# EAGLE board TD_DAC_aux (EAGLE 6.4)
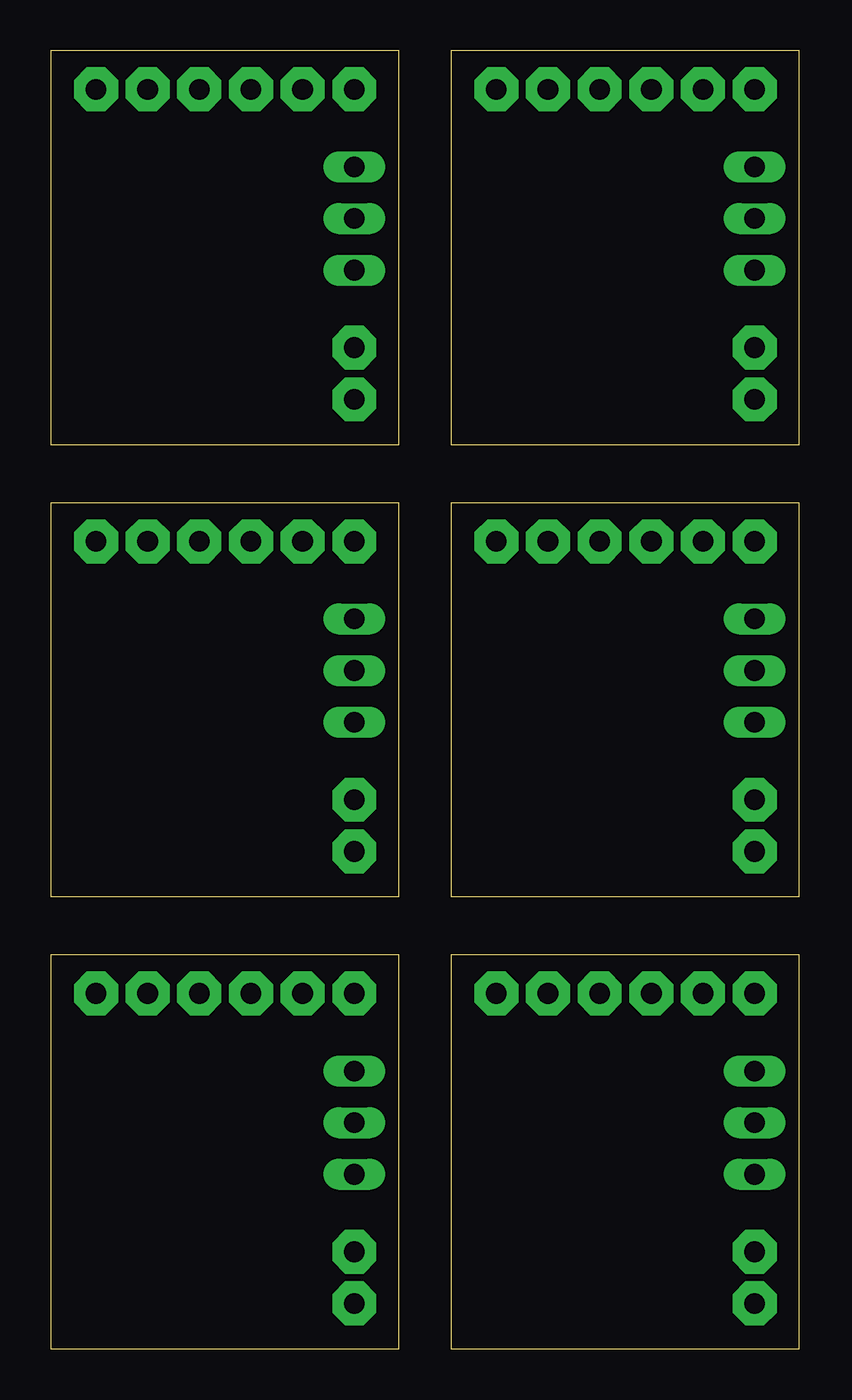
[diagram p0: board, top side]
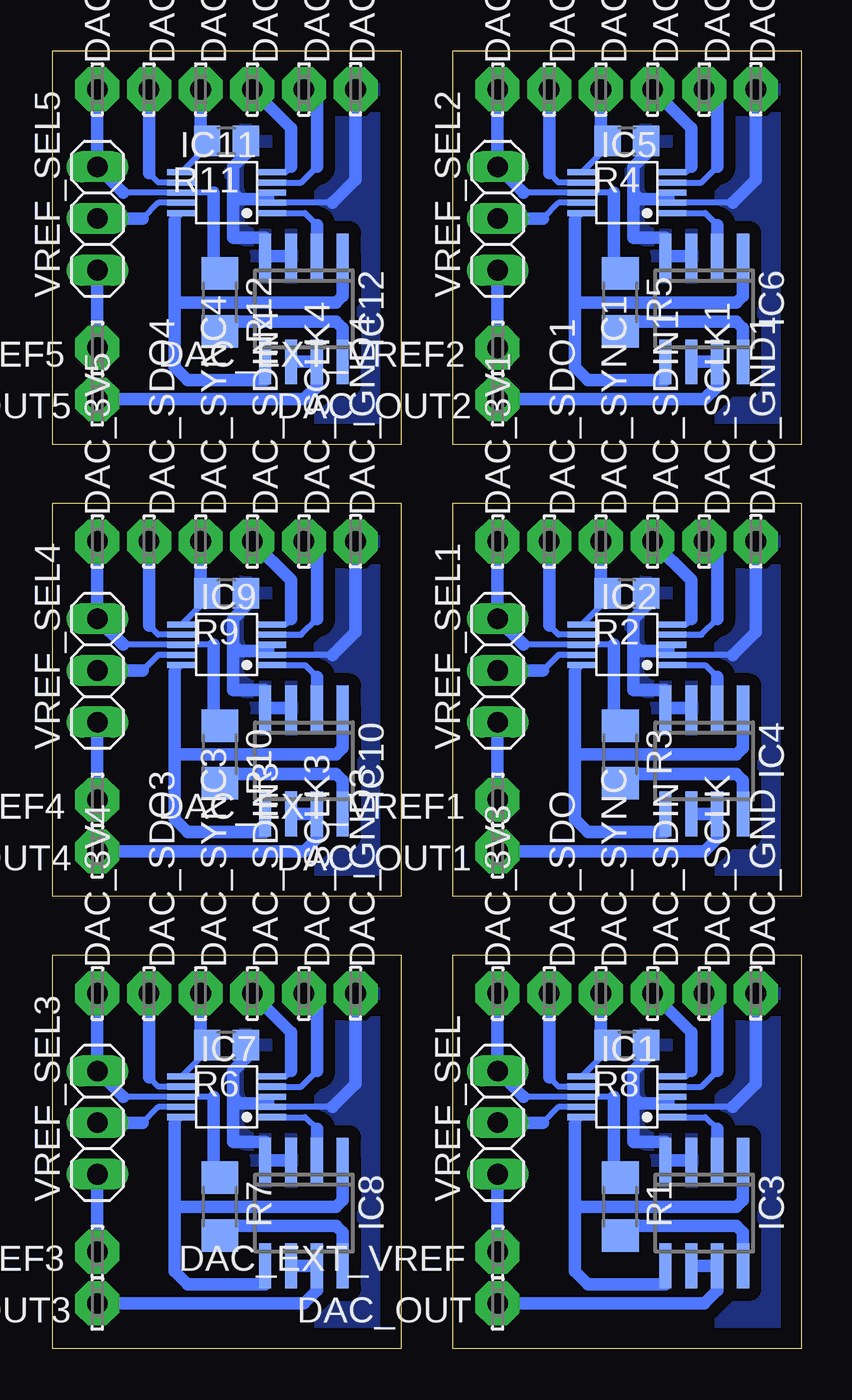
[diagram p1: board, bottom side, seen from below]

Size 36.81 x 63.8 mm. Coordinates in mm from the lower left corner, seen from the top.
Outline: 0,0 17.12,0 17.12,19.36 0,19.36 0,0
Outline: 0,22.23 17.12,22.23 17.12,41.58 0,41.58 0,22.23
Outline: 0,44.45 17.12,44.45 17.12,63.8 0,63.8 0,44.45
Outline: 19.68,0 36.81,0 36.81,19.36 19.68,19.36 19.68,0
Outline: 19.68,22.23 36.81,22.23 36.81,41.58 19.68,41.58 19.68,22.23
Outline: 19.68,44.45 36.81,44.45 36.81,63.8 19.68,63.8 19.68,44.45
Copper layers (1*16): Top 0.035mm / dielectric 1.5mm / Bottom 0.035mm
Design rules "default": minimum track width 10mil, minimum drill 24mil, track to track 8mil, track to pad 8mil, pad to pad 8mil, via to via 8mil, smd to smd 8mil, copper to edge 40mil, drill to drill 8mil, minimum pad ring 10mil, minimum via ring 8mil, stop-mask expansion 4mil, vias tented up to drill 0mil, thermal gap 10mil

## Footprints (pad centres in the part's own frame; a part is rotated, then mirrored left to right if it is on the bottom)
LSP10 = drill 1.016 pad 2.159 octagon: MP 0,0
S-PDSO-G10 = smd 0.3 x 1.45: 1 -1,-2.2; 2 -0.5,-2.2; 3 0,-2.2; 4 0.5,-2.2; 5 1,-2.2; 6 1,2.2; 7 0.5,2.2; 8 0,2.2; 9 -0.5,2.2; 10 -1,2.2
SO08 = smd 0.6 x 2.2: 1 -1.905,-2.6; 2 -0.635,-2.6; 3 0.635,-2.6; 4 1.905,-2.6; 5 1.905,2.6; 6 0.635,2.6; 7 -0.635,2.6; 8 -1.905,2.6
R1206 = smd 1.6 x 1.803: 1 -1.422,0; 2 1.422,0
R0805 = smd 1.3 x 1.5: 1 -0.95,0; 2 0.95,0
1X03 = drill 1.016 long: 1 -2.54,0; 2 0,0; 3 2.54,0

## Placement (x,y rotation side)
DAC_3V1  LSP10  [LSP10]  14.92,39.69 90 bottom
DAC_3V2  LSP10  [LSP10]  14.92,61.91 90 bottom
DAC_3V3  LSP10  [LSP10]  14.92,17.46 90 bottom
DAC_3V4  LSP10  [LSP10]  34.61,17.46 90 bottom
DAC_3V5  LSP10  [LSP10]  34.61,39.69 90 bottom
DAC_3V6  LSP10  [LSP10]  34.61,61.91 90 bottom
DAC_EXT_VREF  LSP10  [LSP10]  14.92,4.76 90 bottom
DAC_EXT_VREF1  LSP10  [LSP10]  14.92,26.99 90 bottom
DAC_EXT_VREF2  LSP10  [LSP10]  14.92,49.21 90 bottom
DAC_EXT_VREF3  LSP10  [LSP10]  34.61,4.76 90 bottom
DAC_EXT_VREF4  LSP10  [LSP10]  34.61,26.99 90 bottom
DAC_EXT_VREF5  LSP10  [LSP10]  34.61,49.21 90 bottom
DAC_GND  LSP10  [LSP10]  2.22,17.46 270 bottom
DAC_GND1  LSP10  [LSP10]  2.22,39.69 270 bottom
DAC_GND2  LSP10  [LSP10]  2.22,61.91 270 bottom
DAC_GND3  LSP10  [LSP10]  21.91,17.46 270 bottom
DAC_GND4  LSP10  [LSP10]  21.91,39.69 270 bottom
DAC_GND5  LSP10  [LSP10]  21.91,61.91 270 bottom
DAC_OUT  LSP10  [LSP10]  14.92,2.22 270 bottom
DAC_OUT1  LSP10  [LSP10]  14.92,24.45 270 bottom
DAC_OUT2  LSP10  [LSP10]  14.92,46.67 270 bottom
DAC_OUT3  LSP10  [LSP10]  34.61,2.22 270 bottom
DAC_OUT4  LSP10  [LSP10]  34.61,24.45 270 bottom
DAC_OUT5  LSP10  [LSP10]  34.61,46.67 270 bottom
DAC_SCLK  LSP10  [LSP10]  4.76,17.46 90 bottom
DAC_SCLK1  LSP10  [LSP10]  4.76,39.69 90 bottom
DAC_SCLK2  LSP10  [LSP10]  4.76,61.91 90 bottom
DAC_SCLK3  LSP10  [LSP10]  24.45,17.46 90 bottom
DAC_SCLK4  LSP10  [LSP10]  24.45,39.69 90 bottom
DAC_SCLK5  LSP10  [LSP10]  24.45,61.91 90 bottom
DAC_SDIN  LSP10  [LSP10]  7.3,17.46 90 bottom
DAC_SDIN1  LSP10  [LSP10]  7.3,39.69 90 bottom
DAC_SDIN2  LSP10  [LSP10]  7.3,61.91 90 bottom
DAC_SDIN3  LSP10  [LSP10]  26.99,17.46 90 bottom
DAC_SDIN4  LSP10  [LSP10]  26.99,39.69 90 bottom
DAC_SDIN5  LSP10  [LSP10]  26.99,61.91 90 bottom
DAC_SDO  LSP10  [LSP10]  12.38,17.46 90 bottom
DAC_SDO1  LSP10  [LSP10]  12.38,39.69 90 bottom
DAC_SDO2  LSP10  [LSP10]  12.38,61.91 90 bottom
DAC_SDO3  LSP10  [LSP10]  32.07,17.46 90 bottom
DAC_SDO4  LSP10  [LSP10]  32.07,39.69 90 bottom
DAC_SDO5  LSP10  [LSP10]  32.07,61.91 90 bottom
DAC_SYNC  LSP10  [LSP10]  9.84,17.46 90 bottom
DAC_SYNC1  LSP10  [LSP10]  9.84,39.69 90 bottom
DAC_SYNC2  LSP10  [LSP10]  9.84,61.91 90 bottom
DAC_SYNC3  LSP10  [LSP10]  29.53,17.46 90 bottom
DAC_SYNC4  LSP10  [LSP10]  29.53,39.69 90 bottom
DAC_SYNC5  LSP10  [LSP10]  29.53,61.91 90 bottom
IC1  [S-PDSO-G10]  8.57,12.38 90 bottom
IC2  [S-PDSO-G10]  8.57,34.61 90 bottom
IC3  LM358D  [SO08]  4.76,6.67 180 bottom
IC4  LM358D  [SO08]  4.76,28.89 180 bottom
IC5  [S-PDSO-G10]  8.57,56.83 90 bottom
IC6  LM358D  [SO08]  4.76,51.12 180 bottom
IC7  [S-PDSO-G10]  28.26,12.38 90 bottom
IC8  LM358D  [SO08]  24.45,6.67 180 bottom
IC9  [S-PDSO-G10]  28.26,34.61 90 bottom
IC10  LM358D  [SO08]  24.45,28.89 180 bottom
IC11  [S-PDSO-G10]  28.26,56.83 90 bottom
IC12  LM358D  [SO08]  24.45,51.12 180 bottom
R1  0  [R1206]  8.89,6.99 270 bottom
R2  1k  [R0805]  8.57,37.15 180 bottom
R3  0  [R1206]  8.89,29.21 270 bottom
R4  1k  [R0805]  8.57,59.37 180 bottom
R5  0  [R1206]  8.89,51.44 270 bottom
R6  1k  [R0805]  28.26,14.92 180 bottom
R7  0  [R1206]  28.57,6.99 270 bottom
R8  1k  [R0805]  8.57,14.92 180 bottom
R9  1k  [R0805]  28.26,37.15 180 bottom
R10  0  [R1206]  28.57,29.21 270 bottom
R11  1k  [R0805]  28.26,59.37 180 bottom
R12  0  [R1206]  28.57,51.44 270 bottom
VREF_SEL  [1X03]  14.92,11.11 90 bottom
VREF_SEL1  [1X03]  14.92,33.34 90 bottom
VREF_SEL2  [1X03]  14.92,55.56 90 bottom
VREF_SEL3  [1X03]  34.61,11.11 90 bottom
VREF_SEL4  [1X03]  34.61,33.34 90 bottom
VREF_SEL5  [1X03]  34.61,55.56 90 bottom

## Library data of the parts
DAC_3V1-DAC_3V6 DAC_EXT_VREF DAC_EXT_VREF1-DAC_EXT_VREF5 DAC_GND DAC_GND1-DAC_GND5 DAC_OUT DAC_OUT1-DAC_OUT5 DAC_SCLK DAC_SCLK1-DAC_SCLK5 DAC_SDIN DAC_SDIN1-DAC_SDIN5 DAC_SDO DAC_SDO1-DAC_SDO5 DAC_SYNC DAC_SYNC1-DAC_SYNC5 = solpad
IC1 IC2 IC5 IC7 IC9 IC11 = DAC7811
IC3 IC4 IC6 IC8 IC10 IC12 = linear
R1-R12 = rcl
VREF_SEL VREF_SEL1-VREF_SEL5 = pinhead

## Nets
0V: DAC_GND.MP IC1.2 IC1.3 IC3.3 IC3.4 R8.1
0V1: DAC_GND1.MP IC2.2 IC2.3 IC4.3 IC4.4 R2.1
0V2: DAC_GND2.MP IC5.2 IC5.3 IC6.3 IC6.4 R4.1
0V3: DAC_GND3.MP IC7.2 IC7.3 IC8.3 IC8.4 R6.1
0V4: DAC_GND4.MP IC9.2 IC9.3 IC10.3 IC10.4 R9.1
0V5: DAC_GND5.MP IC11.2 IC11.3 IC12.3 IC12.4 R11.1
+3V1: DAC_3V1.MP IC2.8 R3.1 VREF_SEL1.3
+3V2: DAC_3V2.MP IC5.8 R5.1 VREF_SEL2.3
+3V3: DAC_3V3.MP IC1.8 R1.1 VREF_SEL.3
+3V4: DAC_3V4.MP IC7.8 R7.1 VREF_SEL3.3
+3V5: DAC_3V5.MP IC9.8 R10.1 VREF_SEL4.3
+3V6: DAC_3V6.MP IC11.8 R12.1 VREF_SEL5.3
MCU_SCLK: DAC_SCLK.MP IC1.4
MCU_SCLK1: DAC_SCLK1.MP IC2.4
MCU_SCLK2: DAC_SCLK2.MP IC5.4
MCU_SCLK3: DAC_SCLK3.MP IC7.4
MCU_SCLK4: DAC_SCLK4.MP IC9.4
MCU_SCLK5: DAC_SCLK5.MP IC11.4
MCU_SDO: DAC_SDIN.MP IC1.5
MCU_SDO1: DAC_SDIN1.MP IC2.5
MCU_SDO2: DAC_SDIN2.MP IC5.5
MCU_SDO3: DAC_SDIN3.MP IC7.5
MCU_SDO4: DAC_SDIN4.MP IC9.5
MCU_SDO5: DAC_SDIN5.MP IC11.5
N$1: IC1.1 IC3.2
N$2: DAC_OUT.MP IC3.6 IC3.7
N$3: IC1.9 VREF_SEL.2
N$4: DAC_EXT_VREF.MP VREF_SEL.1
N$5: DAC_SYNC.MP IC1.6 R8.2
N$6: IC1.10 IC3.1 IC3.5
N$7: IC3.8 R1.2
N$8: IC2.1 IC4.2
N$9: DAC_SDO.MP IC1.7
N$10: DAC_SYNC1.MP IC2.6 R2.2
N$11: DAC_SDO1.MP IC2.7
N$12: DAC_OUT1.MP IC4.6 IC4.7
N$13: IC2.9 VREF_SEL1.2
N$14: DAC_EXT_VREF1.MP VREF_SEL1.1
N$15: IC2.10 IC4.1 IC4.5
N$16: IC4.8 R3.2
N$17: IC5.1 IC6.2
N$18: DAC_SYNC2.MP IC5.6 R4.2
N$19: DAC_SDO2.MP IC5.7
N$20: DAC_OUT2.MP IC6.6 IC6.7
N$21: IC5.9 VREF_SEL2.2
N$22: DAC_EXT_VREF2.MP VREF_SEL2.1
N$23: IC5.10 IC6.1 IC6.5
N$24: IC6.8 R5.2
N$25: IC7.1 IC8.2
N$26: DAC_SYNC3.MP IC7.6 R6.2
N$27: DAC_SDO3.MP IC7.7
N$28: DAC_OUT3.MP IC8.6 IC8.7
N$29: IC7.9 VREF_SEL3.2
N$30: DAC_EXT_VREF3.MP VREF_SEL3.1
N$31: IC7.10 IC8.1 IC8.5
N$32: IC8.8 R7.2
N$33: IC9.1 IC10.2
N$34: DAC_SYNC4.MP IC9.6 R9.2
N$35: DAC_SDO4.MP IC9.7
N$36: DAC_OUT4.MP IC10.6 IC10.7
N$37: IC9.9 VREF_SEL4.2
N$38: DAC_EXT_VREF4.MP VREF_SEL4.1
N$39: IC9.10 IC10.1 IC10.5
N$40: IC10.8 R10.2
N$41: IC11.1 IC12.2
N$42: DAC_SYNC5.MP IC11.6 R11.2
N$43: DAC_SDO5.MP IC11.7
N$44: DAC_OUT5.MP IC12.6 IC12.7
N$45: IC11.9 VREF_SEL5.2
N$46: DAC_EXT_VREF5.MP VREF_SEL5.1
N$47: IC11.10 IC12.1 IC12.5
N$48: IC12.8 R12.2

## Tracks (layer width: path | path; a pad name or v marks a point on that pad's centre or on a via)
0V
  Bottom 0.305: IC1.3 IC1.2 | 3.36,11.88 IC1.2 | R8.1 7.62,14.29 | 6.55,12.06 IC1.2
  Bottom 0.61: DAC_GND.MP 2.22,13.02 3.36,11.88 | 7.62,14.29 8.26,13.65 8.26,12.38 | 8.26,12.38 7.94,12.06 6.55,12.06 | IC3.3 IC3.4 6.67,10.16 8.26,10.16 8.26,12.38
  pour Bottom (isolate 0.61): 0,19.68 17.14,19.68 17.14,0 0,0
0V1
  Bottom 0.305: IC2.3 IC2.2 | 3.36,34.11 IC2.2 | R2.1 7.62,36.51 | 6.55,34.29 IC2.2
  Bottom 0.61: DAC_GND1.MP 2.22,35.24 3.36,34.11 | 7.62,36.51 8.26,35.88 8.26,34.61 | 8.26,34.61 7.94,34.29 6.55,34.29 | IC4.3 IC4.4 6.67,32.38 8.26,32.38 8.26,34.61
  pour Bottom (isolate 0.61): 0,41.91 17.14,41.91 17.14,22.23 0,22.23
0V2
  Bottom 0.305: IC5.3 IC5.2 | 3.36,56.33 IC5.2 | R4.1 7.62,58.73 | 6.55,56.52 IC5.2
  Bottom 0.61: DAC_GND2.MP 2.22,57.47 3.36,56.33 | 7.62,58.73 8.26,58.1 8.26,56.83 | 8.26,56.83 7.94,56.52 6.55,56.52 | IC6.3 IC6.4 6.67,54.61 8.26,54.61 8.26,56.83
  pour Bottom (isolate 0.61): 0,64.14 17.14,64.14 17.14,44.45 0,44.45
0V3
  Bottom 0.305: IC7.3 IC7.2 | 23.04,11.88 IC7.2 | R6.1 27.31,14.29 | 26.24,12.06 IC7.2
  Bottom 0.61: DAC_GND3.MP 21.91,13.02 23.04,11.88 | 27.31,14.29 27.94,13.65 27.94,12.38 | 27.94,12.38 27.62,12.06 26.24,12.06 | IC8.3 IC8.4 26.35,10.16 27.94,10.16 27.94,12.38
  pour Bottom (isolate 0.61): 19.68,19.68 36.83,19.68 36.83,0 19.68,0
0V4
  Bottom 0.305: IC9.3 IC9.2 | 23.04,34.11 IC9.2 | R9.1 27.31,36.51 | 26.24,34.29 IC9.2
  Bottom 0.61: DAC_GND4.MP 21.91,35.24 23.04,34.11 | 27.31,36.51 27.94,35.88 27.94,34.61 | 27.94,34.61 27.62,34.29 26.24,34.29 | IC10.3 IC10.4 26.35,32.38 27.94,32.38 27.94,34.61
  pour Bottom (isolate 0.61): 19.68,41.91 36.83,41.91 36.83,22.23 19.68,22.23
0V5
  Bottom 0.305: IC11.3 IC11.2 | 23.04,56.33 IC11.2 | R11.1 27.31,58.73 | 26.24,56.52 IC11.2
  Bottom 0.61: DAC_GND5.MP 21.91,57.47 23.04,56.33 | 27.31,58.73 27.94,58.1 27.94,56.83 | 27.94,56.83 27.62,56.52 26.24,56.52 | IC12.3 IC12.4 26.35,54.61 27.94,54.61 27.94,56.83
  pour Bottom (isolate 0.61): 19.68,64.14 36.83,64.14 36.83,44.45 19.68,44.45
+3V1
  Bottom 0.305: R3.1 8.89,30.48 9.21,30.48 | 9.21,34.61 IC2.8 13.65,34.61
  Bottom 0.61: DAC_3V1.MP VREF_SEL1.3 13.65,34.61 | 9.21,30.48 9.21,34.61
+3V2
  Bottom 0.305: R5.1 8.89,52.7 9.21,52.7 | 9.21,56.83 IC5.8 13.65,56.83
  Bottom 0.61: DAC_3V2.MP VREF_SEL2.3 13.65,56.83 | 9.21,52.7 9.21,56.83
+3V3
  Bottom 0.305: R1.1 8.89,8.26 9.21,8.26 | 9.21,12.38 IC1.8 13.65,12.38
  Bottom 0.61: DAC_3V3.MP VREF_SEL.3 13.65,12.38 | 9.21,8.26 9.21,12.38
+3V4
  Bottom 0.305: R7.1 28.57,8.26 28.89,8.26 | 28.89,12.38 IC7.8 33.34,12.38
  Bottom 0.61: DAC_3V4.MP VREF_SEL3.3 33.34,12.38 | 28.89,8.26 28.89,12.38
+3V5
  Bottom 0.305: R10.1 28.57,30.48 28.89,30.48 | 28.89,34.61 IC9.8 33.34,34.61
  Bottom 0.61: DAC_3V5.MP VREF_SEL4.3 33.34,34.61 | 28.89,30.48 28.89,34.61
+3V6
  Bottom 0.305: R12.1 28.57,52.7 28.89,52.7 | 28.89,56.83 IC11.8 33.34,56.83
  Bottom 0.61: DAC_3V6.MP VREF_SEL5.3 33.34,56.83 | 28.89,52.7 28.89,56.83
MCU_SCLK
  Bottom 0.305: IC1.4 4.9,12.88 4.13,13.65
  Bottom 0.61: 4.13,13.65 4.13,16.83 DAC_SCLK.MP
MCU_SCLK1
  Bottom 0.305: IC2.4 4.9,35.11 4.13,35.88
  Bottom 0.61: 4.13,35.88 4.13,39.05 DAC_SCLK1.MP
MCU_SCLK2
  Bottom 0.305: IC5.4 4.9,57.33 4.13,58.1
  Bottom 0.61: 4.13,58.1 4.13,61.28 DAC_SCLK2.MP
MCU_SCLK3
  Bottom 0.305: IC7.4 24.58,12.88 23.81,13.65
  Bottom 0.61: 23.81,13.65 23.81,16.83 DAC_SCLK3.MP
MCU_SCLK4
  Bottom 0.305: IC9.4 24.58,35.11 23.81,35.88
  Bottom 0.61: 23.81,35.88 23.81,39.05 DAC_SCLK4.MP
MCU_SCLK5
  Bottom 0.305: IC11.4 24.58,57.33 23.81,58.1
  Bottom 0.61: 23.81,58.1 23.81,61.28 DAC_SCLK5.MP
MCU_SDO
  Bottom 0.305: IC1.5 5.67,13.38 5.4,13.65
  Bottom 0.61: 5.4,13.65 5.4,15.56 DAC_SDIN.MP
MCU_SDO1
  Bottom 0.305: IC2.5 5.67,35.61 5.4,35.88
  Bottom 0.61: 5.4,35.88 5.4,37.78 DAC_SDIN1.MP
MCU_SDO2
  Bottom 0.305: IC5.5 5.67,57.83 5.4,58.1
  Bottom 0.61: 5.4,58.1 5.4,60.01 DAC_SDIN2.MP
MCU_SDO3
  Bottom 0.305: IC7.5 25.35,13.38 25.08,13.65
  Bottom 0.61: 25.08,13.65 25.08,15.56 DAC_SDIN3.MP
MCU_SDO4
  Bottom 0.305: IC9.5 25.35,35.61 25.08,35.88
  Bottom 0.61: 25.08,35.88 25.08,37.78 DAC_SDIN4.MP
MCU_SDO5
  Bottom 0.305: IC11.5 25.35,57.83 25.08,58.1
  Bottom 0.61: 25.08,58.1 25.08,60.01 DAC_SDIN5.MP
N$1
  Bottom 0.305: IC1.1 4.71,11.38 4.13,10.79
  Bottom 0.61: 4.13,10.79 IC3.2
N$2
  Bottom 0.61: DAC_OUT.MP 4.76,2.22 4.13,2.86 IC3.7 IC3.6
N$3
  Bottom 0.305: IC1.9 11.93,11.88 12.7,11.11
  Bottom 0.61: 12.7,11.11 VREF_SEL.2
N$4
  Bottom 0.61: DAC_EXT_VREF.MP VREF_SEL.1
N$5
  Bottom 0.305: 9.84,15.24 R8.2 9.52,14.63 IC1.6
  Bottom 0.61: DAC_SYNC.MP 9.84,15.24
N$6
  Bottom 0.305: IC3.5 6.67,3.17 | 11.11,11.04 IC1.10
  Bottom 0.406: 10.79,6.99 11.11,7.3
  Bottom 0.61: IC3.1 2.86,7.3 3.17,6.99 10.79,6.99 | 6.67,3.17 10.48,3.17 11.11,3.81 11.11,7.3 11.11,11.04
N$7
  Bottom 0.305: R1.2 8.42,6.03
  Bottom 0.61: 8.42,6.03 3.17,6.03 2.86,5.71 IC3.8
N$8
  Bottom 0.305: IC2.1 4.71,33.61 4.13,33.02
  Bottom 0.61: 4.13,33.02 IC4.2
N$9
  Bottom 0.305: IC1.7 11.93,12.88 12.38,13.34
  Bottom 0.61: 12.38,13.34 DAC_SDO.MP
N$10
  Bottom 0.305: 9.84,37.47 R2.2 9.52,36.86 IC2.6
  Bottom 0.61: DAC_SYNC1.MP 9.84,37.47
N$11
  Bottom 0.305: IC2.7 11.93,35.11 12.38,35.56
  Bottom 0.61: 12.38,35.56 DAC_SDO1.MP
N$12
  Bottom 0.61: DAC_OUT1.MP 4.76,24.45 4.13,25.08 IC4.7 IC4.6
N$13
  Bottom 0.305: IC2.9 11.93,34.11 12.7,33.34
  Bottom 0.61: 12.7,33.34 VREF_SEL1.2
N$14
  Bottom 0.61: DAC_EXT_VREF1.MP VREF_SEL1.1
N$15
  Bottom 0.305: IC4.5 6.67,25.4 | 11.11,33.27 IC2.10
  Bottom 0.406: 10.79,29.21 11.11,29.53
  Bottom 0.61: IC4.1 2.86,29.53 3.17,29.21 10.79,29.21 | 6.67,25.4 10.48,25.4 11.11,26.04 11.11,29.53 11.11,33.27
N$16
  Bottom 0.305: R3.2 8.42,28.26
  Bottom 0.61: 8.42,28.26 3.17,28.26 2.86,27.94 IC4.8
N$17
  Bottom 0.305: IC5.1 4.71,55.83 4.13,55.24
  Bottom 0.61: 4.13,55.24 IC6.2
N$18
  Bottom 0.305: 9.84,59.69 R4.2 9.52,59.08 IC5.6
  Bottom 0.61: DAC_SYNC2.MP 9.84,59.69
N$19
  Bottom 0.305: IC5.7 11.93,57.33 12.38,57.78
  Bottom 0.61: 12.38,57.78 DAC_SDO2.MP
N$20
  Bottom 0.61: DAC_OUT2.MP 4.76,46.67 4.13,47.31 IC6.7 IC6.6
N$21
  Bottom 0.305: IC5.9 11.93,56.33 12.7,55.56
  Bottom 0.61: 12.7,55.56 VREF_SEL2.2
N$22
  Bottom 0.61: DAC_EXT_VREF2.MP VREF_SEL2.1
N$23
  Bottom 0.305: IC6.5 6.67,47.62 | 11.11,55.49 IC5.10
  Bottom 0.406: 10.79,51.44 11.11,51.75
  Bottom 0.61: IC6.1 2.86,51.75 3.17,51.44 10.79,51.44 | 6.67,47.62 10.48,47.62 11.11,48.26 11.11,51.75 11.11,55.49
N$24
  Bottom 0.305: R5.2 8.42,50.48
  Bottom 0.61: 8.42,50.48 3.17,50.48 2.86,50.16 IC6.8
N$25
  Bottom 0.305: IC7.1 24.4,11.38 23.81,10.79
  Bottom 0.61: 23.81,10.79 IC8.2
N$26
  Bottom 0.305: 29.53,15.24 R6.2 29.21,14.63 IC7.6
  Bottom 0.61: DAC_SYNC3.MP 29.53,15.24
N$27
  Bottom 0.305: IC7.7 31.61,12.88 32.07,13.34
  Bottom 0.61: 32.07,13.34 DAC_SDO3.MP
N$28
  Bottom 0.61: DAC_OUT3.MP 24.45,2.22 23.81,2.86 IC8.7 IC8.6
N$29
  Bottom 0.305: IC7.9 31.61,11.88 32.38,11.11
  Bottom 0.61: 32.38,11.11 VREF_SEL3.2
N$30
  Bottom 0.61: DAC_EXT_VREF3.MP VREF_SEL3.1
N$31
  Bottom 0.305: IC8.5 26.35,3.17 | 30.8,11.04 IC7.10
  Bottom 0.406: 30.48,6.99 30.8,7.3
  Bottom 0.61: IC8.1 22.54,7.3 22.86,6.99 30.48,6.99 | 26.35,3.17 30.16,3.17 30.8,3.81 30.8,7.3 30.8,11.04
N$32
  Bottom 0.305: R7.2 28.11,6.03
  Bottom 0.61: 28.11,6.03 22.86,6.03 22.54,5.71 IC8.8
N$33
  Bottom 0.305: IC9.1 24.4,33.61 23.81,33.02
  Bottom 0.61: 23.81,33.02 IC10.2
N$34
  Bottom 0.305: 29.53,37.47 R9.2 29.21,36.86 IC9.6
  Bottom 0.61: DAC_SYNC4.MP 29.53,37.47
N$35
  Bottom 0.305: IC9.7 31.61,35.11 32.07,35.56
  Bottom 0.61: 32.07,35.56 DAC_SDO4.MP
N$36
  Bottom 0.61: DAC_OUT4.MP 24.45,24.45 23.81,25.08 IC10.7 IC10.6
N$37
  Bottom 0.305: IC9.9 31.61,34.11 32.38,33.34
  Bottom 0.61: 32.38,33.34 VREF_SEL4.2
N$38
  Bottom 0.61: DAC_EXT_VREF4.MP VREF_SEL4.1
N$39
  Bottom 0.305: IC10.5 26.35,25.4 | 30.8,33.27 IC9.10
  Bottom 0.406: 30.48,29.21 30.8,29.53
  Bottom 0.61: IC10.1 22.54,29.53 22.86,29.21 30.48,29.21 | 26.35,25.4 30.16,25.4 30.8,26.04 30.8,29.53 30.8,33.27
N$40
  Bottom 0.305: R10.2 28.11,28.26
  Bottom 0.61: 28.11,28.26 22.86,28.26 22.54,27.94 IC10.8
N$41
  Bottom 0.305: IC11.1 24.4,55.83 23.81,55.24
  Bottom 0.61: 23.81,55.24 IC12.2
N$42
  Bottom 0.305: 29.53,59.69 R11.2 29.21,59.08 IC11.6
  Bottom 0.61: DAC_SYNC5.MP 29.53,59.69
N$43
  Bottom 0.305: IC11.7 31.61,57.33 32.07,57.78
  Bottom 0.61: 32.07,57.78 DAC_SDO5.MP
N$44
  Bottom 0.61: DAC_OUT5.MP 24.45,46.67 23.81,47.31 IC12.7 IC12.6
N$45
  Bottom 0.305: IC11.9 31.61,56.33 32.38,55.56
  Bottom 0.61: 32.38,55.56 VREF_SEL5.2
N$46
  Bottom 0.61: DAC_EXT_VREF5.MP VREF_SEL5.1
N$47
  Bottom 0.305: IC12.5 26.35,47.62 | 30.8,55.49 IC11.10
  Bottom 0.406: 30.48,51.44 30.8,51.75
  Bottom 0.61: IC12.1 22.54,51.75 22.86,51.44 30.48,51.44 | 26.35,47.62 30.16,47.62 30.8,48.26 30.8,51.75 30.8,55.49
N$48
  Bottom 0.305: R12.2 28.11,50.48
  Bottom 0.61: 28.11,50.48 22.86,50.48 22.54,50.16 IC12.8